# EAGLE board PCB v4 (EAGLE 9.7.0)
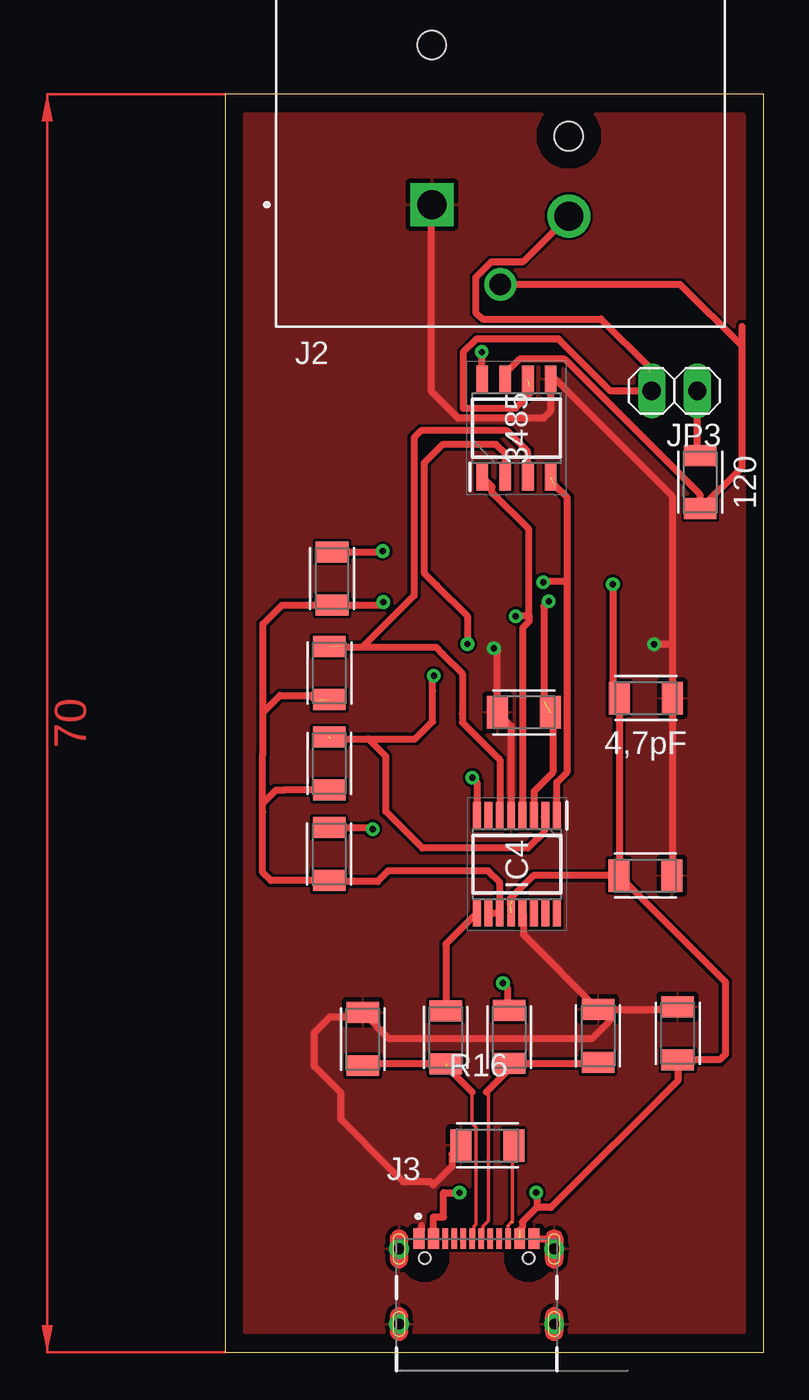
[diagram p0: board, top side]
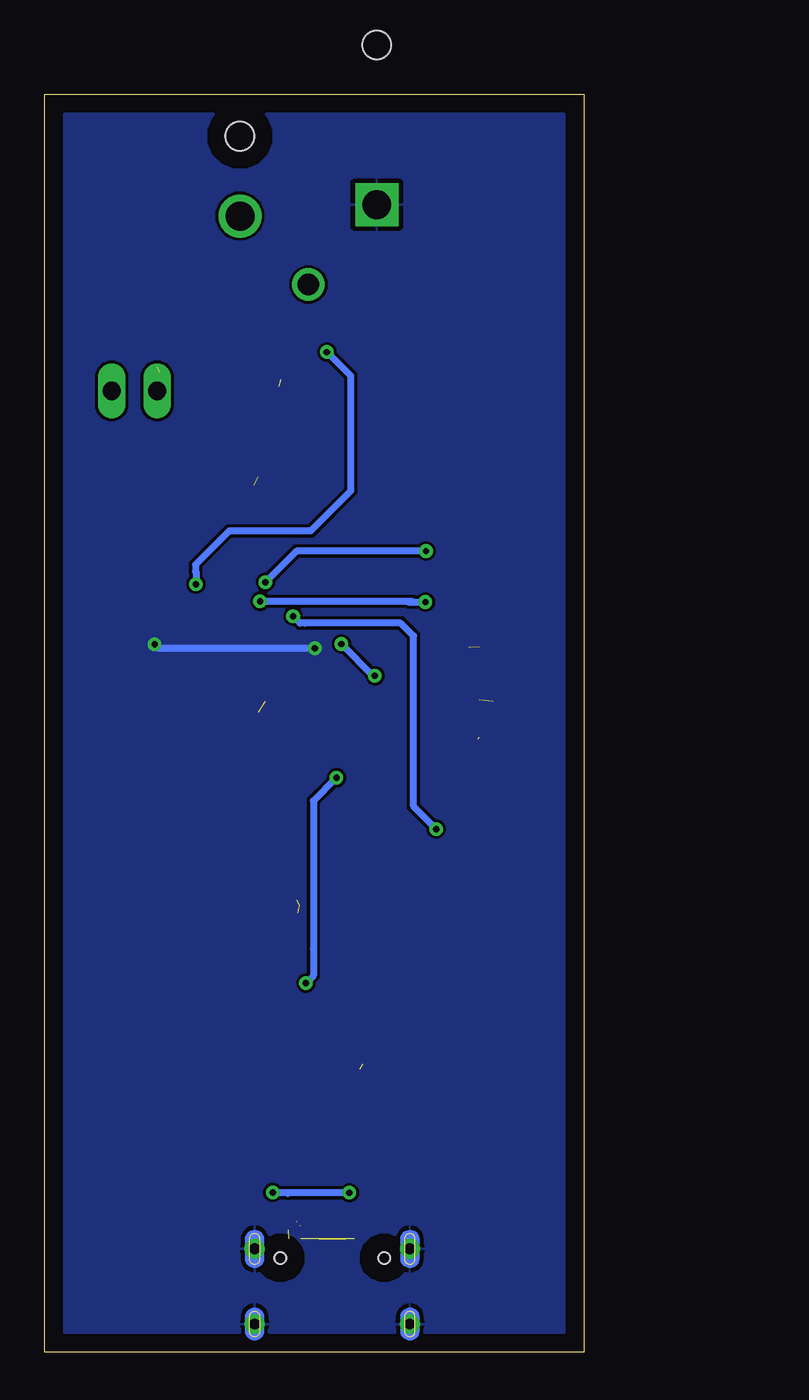
[diagram p1: board, bottom side, seen from below]

Size 30 x 70 mm. Coordinates in mm from the lower left corner, seen from the top.
Outline: 0,0 30,0 30,70 0,70 0,0
Copper layers (1*16): Top / Bottom
Stack-up Default Layer Stack: Top User Defined 0.035mm / Dielectric-1 User Defined 1.5mm / Bottom User Defined 0.035mm
Design rules: minimum copper width 0.4mm, minimum drill size 0.35mm, copper clearance wire_polygon to wire_polygon 6mil, copper clearance wire_polygon to pad_smd 6mil, copper clearance wire_polygon to via 6mil, copper clearance pad_smd to pad_smd 6mil, copper clearance pad_smd to via 6mil, copper clearance via to via 6mil, copper clearance smd to pad (same net) 6mil, copper clearance smd to via (same net) 6mil, copper clearance smd to smd (same net) 6mil, dimension clearance 40mil, via restrict clearance 0mil, restrict clearance 0mil, drill distance 6mil, keepout clearance 0mil

## Footprints (pad centres in the part's own frame; a part is rotated, then mirrored left to right if it is on the bottom)
RESC3216X70 = smd 1.165 x 1.815: 1 -1.475,0; 2 1.475,0
SOIC127P600X175-8N = smd 1.525 x 0.65: 1 -2.712,1.905; 2 -2.712,0.635; 3 -2.712,-0.635; 4 -2.712,-1.905; 5 2.712,-1.905; 6 2.712,-0.635; 7 2.712,0.635; 8 2.712,1.905
CAPC3216X135 = smd 1.165 x 1.815: 1 -1.475,0; 2 1.475,0
SOP64P599X175-16N = smd 1.526 x 0.435: 1 -2.712,2.222; 2 -2.712,1.588; 3 -2.712,0.952; 4 -2.712,0.318; 5 -2.712,-0.318; 6 -2.712,-0.952; 7 -2.712,-1.588; 8 -2.712,-2.222; 9 2.712,-2.222; 10 2.712,-1.588; 11 2.712,-0.952; 12 2.712,-0.318; 13 2.712,0.318; 14 2.712,0.952; 15 2.712,1.588; 16 2.712,2.222
NEUTRIK_NC3FAAH1 = drill 1.6 square: 1 -3.81,-12.7 | drill 1.6: 2 3.81,-13.335 | drill 1.2: 3 0,-17.145 | hole 1.6: 3.81,-8.89; -3.81,-3.81
GCT_USB4105GFA060 = smd 0.6 x 1.15: A1_B12 -3.2,4.755; A4_B9 -2.4,4.755; B1_A12 3.2,4.755; B4_A9 2.4,4.755 | smd 0.3 x 1.15: A5 -1.25,4.755; A6 -0.25,4.755; A7 0.25,4.755; A8 1.25,4.755; B5 1.75,4.755; B6 0.75,4.755; B7 -0.75,4.755; B8 -1.75,4.755 | drill 0.6 pad 1: SH1 -4.32,4.18; SH2 4.32,4.18; SH3 -4.32,0; SH4 4.32,0 | hole 0.65: 2.89,3.68; -2.89,3.68
1X02 = drill 1.016 long: 1 -1.27,0; 2 1.27,0

## Placement (x,y rotation side)
10K  10K  [RESC3216X70]  5.96,43.06 270 top
120  120  [RESC3216X70]  26.45,48.42 270 top
3485  ADM3485EARZ  [SOIC127P600X175-8N]  16.23,51.43 90 top
C7  100nF  [CAPC3216X135]  16.65,35.61 180 top
C8  100nF  [CAPC3216X135]  23.4,26.53 0 top
C9  4,7pF  [CAPC3216X135]  23.42,36.4 0 top
C10  47pF  [CAPC3216X135]  7.67,17.43 90 top
C11  47pF  [CAPC3216X135]  20.77,17.6 90 top
C12  10nF  [CAPC3216X135]  25.2,17.75 90 top
IC4  FT230XS-R  [SOP64P599X175-16N]  16.25,27.16 270 top
J2  NC3FAAH1  [NEUTRIK_NC3FAAH1]  15.33,76.56 0 top
J3  USB4105GFA060  [GCT_USB4105GFA060]  14.01,1.57 0 top
JP3  PINHD-1X2  [1X02]  25.02,53.5 180 top
R9  27  [RESC3216X70]  12.29,17.52 270 top
R10  27  [RESC3216X70]  15.82,17.54 90 top
R11  10K  [RESC3216X70]  5.8,27.72 270 top
R13  10K  [RESC3216X70]  5.81,37.8 270 top
R15  10K  [RESC3216X70]  5.81,32.76 270 top
R16  10K  [RESC3216X70]  14.6,11.51 0 top

## Library data of the parts
10K 120 R9-R11 R13 R15 R16 = Resistor; CATEGORY: Resistor; SUB-CATEGORY: Fixed
3485 = ADM3485EARZ; DESCRIPTION: +/-15 kV ESD-Protected, 3.3 V,12 Mbps,EIA RS-485/RS-422 Transceiver; HEIGHT: 1.75mm; MANUFACTURER_NAME: Analog Devices; MANUFACTURER_PART_NUMBER: ADM3485EARZ; MOUSER_PART_NUMBER: 584-ADM3485EARZ; MOUSER_PRICE-STOCK: https://www.mouser.co.uk/ProductDetail/Analog-Devices/ADM3485EARZ?qs=BpaRKvA4VqHkSzuHRWJo4g%3D%3D
C7-C12 = Capacitor; CATEGORY: Capacitor
IC4 = FT230XS-R; DESCRIPTION: UART Interface RS232, RS422, RS485, SIE, UART 3MBd, 5 V; HEIGHT: 1.753mm; MANUFACTURER_NAME: FTDI Chip; MANUFACTURER_PART_NUMBER: FT230XS-R; MOUSER_PART_NUMBER: 895-FT230XS-R; MOUSER_PRICE-STOCK: https://www.mouser.co.uk/ProductDetail/FTDI/FT230XS-R?qs=Gp1Yz1mis3XyCLeYOseSng%3D%3D
J2 = NC3FAAH1; AVAILABILITY: In Stock; CHECK_PRICES: https://www.snapeda.com/parts/NC3FAAH1/Neutrik/view-part/?ref=eda; DESCRIPTION: 3 pole female XLR receptacle, grounding: mating connector shell to pin1 and front panel, horizontal PCB mount; MF: Neutrik; MP: NC3FAAH1; PACKAGE: None; PRICE: None; SNAPEDA_LINK: https://www.snapeda.com/parts/NC3FAAH1/Neutrik/view-part/?ref=snap
J3 = USB4105GFA060; AVAILABILITY: In Stock; CHECK_PRICES: https://www.snapeda.com/parts/USB4105GFA060/Global+Connector+Technology/view-part/?ref=eda; DESCRIPTION: USB-C (USB TYPE-C) USB 2.0 Receptacle Connector 24 (16+8 Dummy) Position Surface Mount, Right Angle; Through Hole; MF: Global Connector Technology; MP: USB4105GFA060; PACKAGE: None; PRICE: None; SNAPEDA_LINK: https://www.snapeda.com/parts/USB4105GFA060/Global+Connector+Technology/view-part/?ref=snap
JP3 = Connector; CATEGORY: Headers; DESCRIPTION: Header, Straight, 2 Position; MANUFACTURER: Generic; MPN: Generic; OPERATING_TEMPERATURE: Generic; PART_STATUS: Active; PITCH: 0.100" (2.54mm); ROHS_COMPLIANCE: Generic; SERIES: Generic; SUB-CATEGORY: Headers, Male Pins; TYPE: Board to Board or Cable, Unshrouded, Through Hole, Straight

## Nets
GND: 3485.5 C7.2 C8.2 C9.2 C10.2 C11.2 C12.2 IC4.5 IC4.13 J2.1 J3.A1_B12 J3.B1_A12 J3.SH1 J3.SH2 J3.SH3 J3.SH4 R16.1
N$10: 120.2 3485.7 J2.3
N$11: IC4.8 R10.2
N$12: IC4.9 R9.1
N$13: C11.1 J3.A7 J3.B7 R10.1
N$14: C10.1 J3.A6 J3.B6 R9.2
N$15: 120.1 JP3.1
N$16: 3485.6 J2.2 JP3.2
N$17: J3.A5 J3.B5 R16.2
PWREN#: 3485.2 IC4.2 R15.1
RXD: 3485.1 IC4.4 R11.1
TXD: 10K.1 3485.4 IC4.1
TXDEN: 3485.3 IC4.6 R13.1
VCC: 3485.8 C8.1 C9.1 C12.1 IC4.12 J3.A4_B9 J3.B4_A9
VCCIO: 10K.2 C7.1 IC4.3 IC4.10 IC4.11 R11.2 R13.2 R15.2

## Tracks (layer width: path | path; a pad name or v marks a point on that pad's centre or on a via)
GND  (via drill 0.35)
  Top 0.4: IC4.13 16.63,24.39 16.63,23.54 16.63,23.21 C11.2 25.05,19.07 C12.2 | 8.1,19.33 C10.2 9.1,17.47 20.46,17.47 21.45,18.46 21.45,18.55 | 7.4,18.67 5.85,18.67 4.98,17.8 4.98,15.9 6.45,14.43 6.45,12.95 9.24,10.16 9.93,9.48 10.06,9.48 11.2,9.48 11.25,9.48 11.47,9.48 11.62,9.33 | IC4.5 15.93,34.86 C7.2 15.17,38.98 v14.97,39.18 | R16.1 12.63,11.02 12.63,10.34 11.62,9.33 | 11.62,9.33 11.6,9.31 | C9.2 24.9,26.55 C8.2 | 11.51,63.02 11.51,53.46 12.98,51.98 17.74,51.98 18.14,52.38 3485.5 18.14,54.4 24.89,47.65 24.89,39.31 | 24.89,39.31 24.89,36.33 | v23.89,39.4 24.8,39.4 24.89,39.31 | 10.95,7.05 10.95,6.8 10.8,6.8 J3.A1_B12 | J3.B1_A12 18.45,6.33 18.45,6.32
  Bottom 0.4: v23.89,39.4 23.67,39.18 v14.97,39.18
  pour Top: -0.48,69.9 29.53,69.9 29.53,-0.19 0,-0.19 0,69.89 -0.35,69.89 -0.35,69.9 -0.39,69.9 -0.39,69.87 -0.39,69.91 -0.36,69.91 -0.36,69.9 -0.42,69.9 -0.39,69.9 -0.39,69.89 -0.36,69.89
  pour Bottom: -0.29,69.58 29.89,69.58 29.89,-0.72 0.29,-0.72 0.29,69.86 0,69.86 0,70.58
N$10
  Top 0.4: 120.2 26.45,46.84 | 120.2 26.45,47.72 18.92,55.26 16.39,55.26 15.6,54.46 3485.7 | 120.2 28.78,49.27 28.78,55.98 | 28.78,55.98 28.78,57.1 | 28.78,55.98 25.35,59.42 J2.3
N$11  (via drill 0.35)
  Top 0.4: R10.2 15.72,19.11 15.72,20.29 v15.47,20.54 | v13.77,31.97 14.03,31.72 IC4.8
  Bottom 0.4: v13.77,31.97 15.05,30.69 15.05,22.47 15.05,20.96 v15.47,20.54
N$12
  Top 0.4: IC4.9 13.02,23.44 12.29,22.71 R9.1
N$13  (1 unrouted)
  Top 0.2: J3.A7 14.35,6.42 14.35,7 14.65,7.31 14.65,14.59
  Top 0.4: 14.55,14.49 14.64,14.57 14.65,14.59 15.82,15.75 R10.1 20.71,16.06 C11.1
N$14  (2 unrouted)
  Top 0.2: 13.76,14.48 13.76,12.73 13.96,12.52 13.96,7.11 13.85,7 13.85,6.42 J3.A6
  Top 0.4: R9.2 7.76,16.04 C10.1 | 12.47,15.77 13.76,14.48
N$15
  Top 0.4: 120.1 26.29,50.06 JP3.1
N$16  (2 unrouted)
  Top 0.4: 16.97,53.74 16.97,53.34 16.17,52.54 13.25,52.54 13.25,55.65 14,56.39 18.56,56.39 21.45,53.5 JP3.2 | J2.2 16.58,60.67 14.81,60.67 13.95,59.81 13.95,57.87 14.32,57.5 20.93,57.5 23.62,54.81 23.62,54.53
  Bottom 0.4: 23.75,54.81 JP3.2
N$17  (3 unrouted)
  Top 0.2: 16,10.78 16,7.25 | 15.96,7.25 15.78,7.07 | J3.B5 15.76,7.05
  Top 0.4: R16.2 16.18,11.51 16.18,10.96 16,10.78
PWREN#  (via drill 0.35)  (1 unrouted)
  Top 0.4: IC4.2 17.77,29.81 17.77,28.97 16.86,28.05 10.99,28.05 8.96,30.09 8.96,33.16 7.99,34.13 | 5.91,34.13 7.99,34.13 | 3485.2 15.6,50.01 15.6,50.02 15.1,50.52 12.12,50.52 11.09,49.48 11.09,43.38 11.79,42.67 13.5,40.97 v13.5,39.41 | 7.99,34.13 10.59,34.13 11.39,34.94 11.55,35.1 11.55,36.8 11.55,37.57 v11.63,37.65
  Bottom 0.4: v13.5,39.41 11.73,37.65 v11.63,37.65
RXD  (via drill 0.35)
  Top 0.4: R11.1 8.14,29.2 v8.22,29.12 | IC4.4 16.57,40.31 16.92,40.66 16.92,41.07 | 16.92,41.07 16.81,40.96 v16.19,40.96 | 3485.1 14.87,48.17 14.87,47.85 16.92,45.81 16.92,41.07
  Bottom 0.4: v8.22,29.12 9.48,30.37 9.48,39.87 10.19,40.58 15.54,40.58 15.8,40.58 v16.19,40.96
TXD  (via drill 0.35)  (1 unrouted)
  Top 0.4: IC4.1 18.47,31.71 19.06,32.3 19.06,42.91 | 19.06,42.91 19.06,47.56 18.35,48.27 | 10K.1 8.73,44.53 v8.79,44.59 | v17.72,42.85 17.77,42.91 19.06,42.91
  Bottom 0.4: v8.79,44.59 15.99,44.59 v17.72,42.85
TXDEN  (1 unrouted)
  Top 0.4: IC4.6 15.3,32.98 15.15,33.13 13.21,35.06 13.21,35.53 13.21,37.77 12.12,38.87 11.74,39.24 7.66,39.24 | 6.4,39.24 7.66,39.24 | 3485.3 16.83,48.75 16.83,50.16 15.71,51.28 10.92,51.28 10.52,50.89 10.52,44.53 10.52,42.11 7.66,39.24
VCC  (via drill 0.35)  (3 unrouted)
  Top 0.4: C8.1 21.95,26.55 C9.1 21.59,36.76 v21.59,42.74 | 15.98,25.34 15.98,25.18 | 15.87,24.87 15.87,25.23 17.16,26.53 C8.1 | 3485.8 14.3,54.17 v14.3,55.66 | 16.43,6.82 16.55,6.94 16.55,7.25 17.36,8.06 | C8.1 27.85,20.6 27.85,16.58 27.54,16.27 C12.1 25.2,15.11 18.15,8.06 17.36,8.06 | J3.A4_B9 11.61,7.04 | 11.61,7.04 11.61,7.29 | 11.61,7.04 11.61,7.53 12.17,7.53 12.17,8.81 12.17,8.88 v13.06,8.88 | v17.32,8.89 17.36,8.89 17.36,8.06
  Bottom 0.4: v21.59,42.74 21.59,43.44 21.62,43.47 21.62,43.83 19.74,45.7 15.2,45.7 12.98,47.93 12.98,54.34 v14.3,55.66 | v13.06,8.88 16.49,8.88 | 16.49,8.88 16.49,8.83 | 16.49,8.88 17.32,8.88 v17.32,8.89
VCCIO  (via drill 0.35)  (2 unrouted)
  Top 0.4: IC4.3 17.2,31.22 18.25,32.27 18.25,35.48 C7.1 | 2.1,30.09 2.1,26.71 2.56,26.25 R11.2 5.85,26.2 8.5,26.2 9.09,26.79 14.59,26.79 14.64,26.79 15.3,26.13 IC4.11 IC4.10 | 2.1,30.09 2.1,30.55 2.83,31.28 3.26,31.28 R15.2 | 2.12,35.61 2.12,33.3 2.1,33.28 2.1,30.09 | 2.12,35.61 3.06,36.55 4.77,36.55 5.07,36.25 | 2.12,35.61 2.12,40.53 2.66,41.07 3.17,41.58 10K.2 8.65,41.58 v8.82,41.75 | v18.03,41.79 17.74,41.51 17.74,36.22
  Bottom 0.4: v18.03,41.79 9.78,41.79 | 9.78,41.79 9.57,41.79 9.55,41.77 | 9.78,41.79 9.74,41.75 v8.82,41.75
(copper drawn outside any net)
  shapes: Top area x1